# Altium PCB PCB.PcbDoc (part 2 of 2)
Units mm, origin at the board's own origin, x right, y up, seen from the top; angles counter-clockwise.
Board outline 50 x 50 mm, 2 copper layers (Top Layer, Bottom Layer), stack 1.509 mm thick; 202 components, 107 nets, 579 pads, 22 vias.
Unrouted connection lines stored in the file: 421.
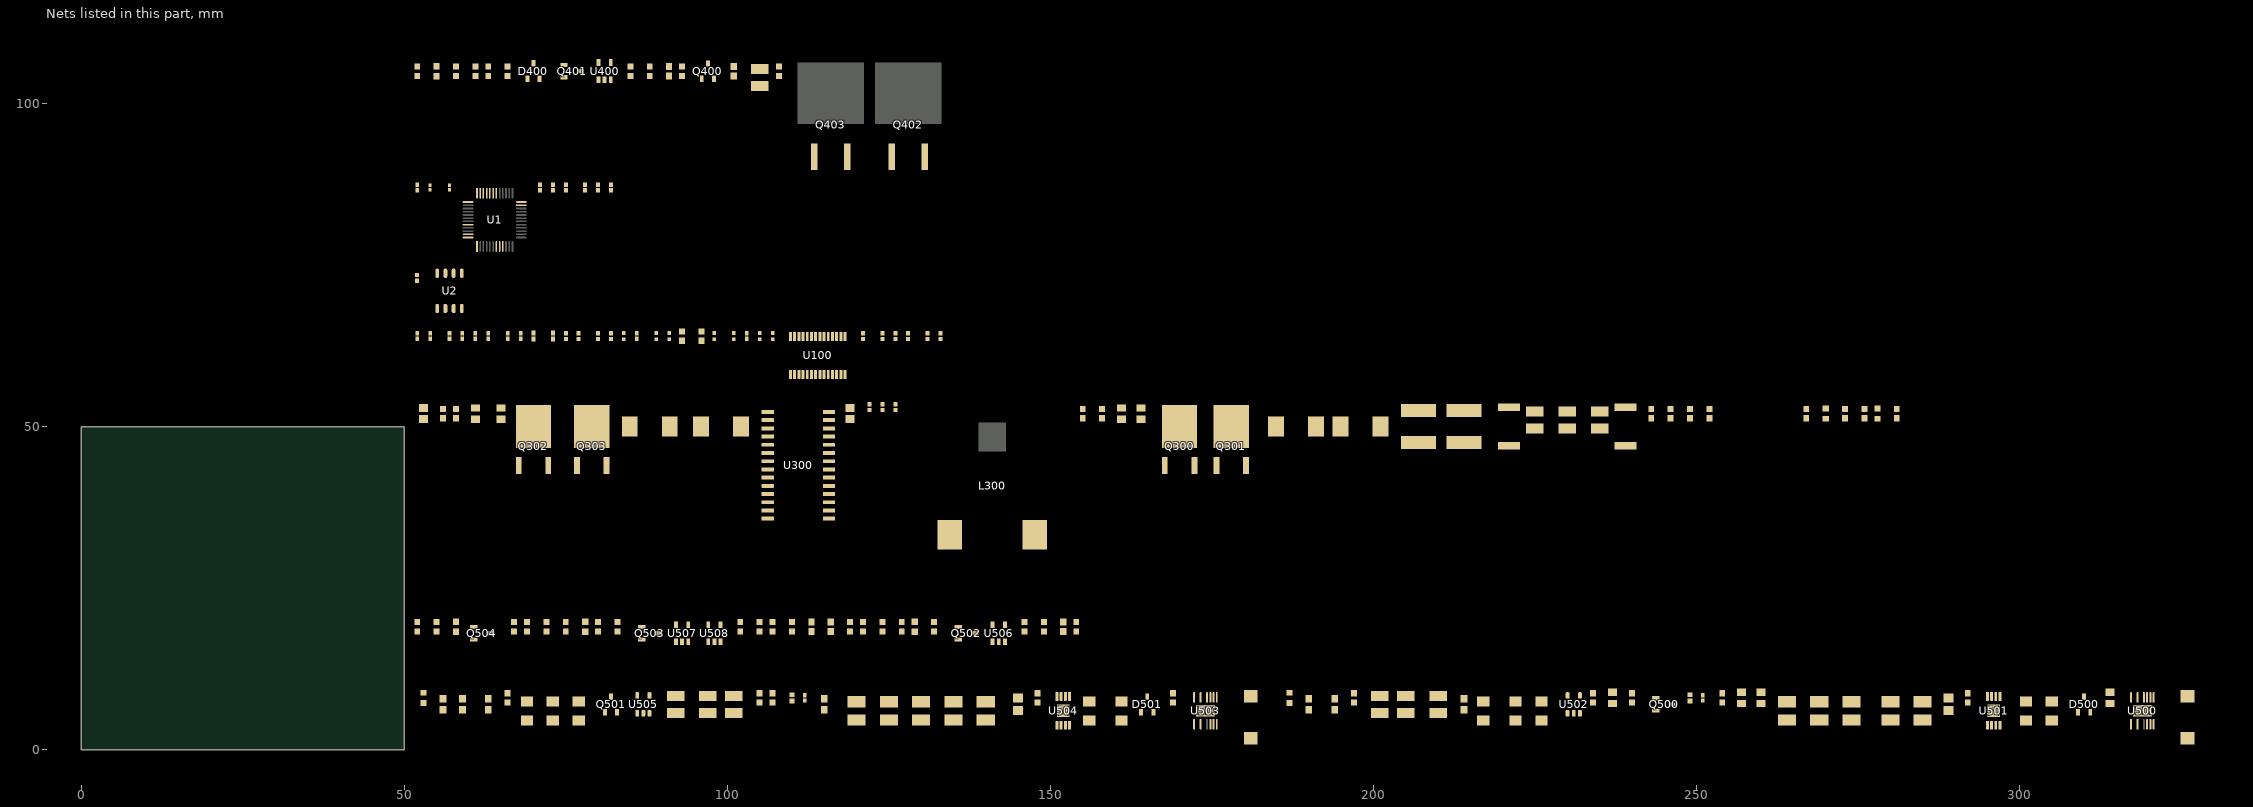
[diagram p2: the nets of this part, all layers, seen from the top]

## Part data (continued)
D300 D301 D302 D303: library part CMP-022-000008-3, "Schottky Barrier Diode 100V 5A 850mV SMC MDD", Blocking Voltage=100V, Forward Current=5A0, LCSC Part Number=C19229, Package=DO-214AB, ComponentLink1Description=Datasheet, ComponentLink1URL=https://datasheet.lcsc.com/lcsc/2012031610_MDD（Microdiode-Electronics）-SS510C_C19229.pdf, Placement=CRITICAL
D400 D500 D501: library part CMP-022-000007-2, "Schottky Barrier Diode Common Cathode 30V 200mA", Forward Current=200mA, LCSC Part Number=C559091, Manufacturer=LRC, Package=SOT23-3, Reverse Voltage=30V, ComponentLink1Description=Datasheet, ComponentLink1URL=https://datasheet.lcsc.com/lcsc/2006151233_LRC-S-LBAT54CLT1G_C559091.pdf, Design Item ID=LBAT54CLT1G, Placement=CRITICAL, Source="Schottky Barrier Diodes.SchLib"
L300: library part CMP-000028-3, "Helically Would High Current Inductor. 30uH, 8.6A, 17mOhm", DC Resistance=17mR, Manufacturor=TDK, Rated Current=8A6, Saturation Current=11A5, Tolerance=±10%, ComponentLink1Description=Datasheet, ComponentLink1URL=https://media.digikey.com/pdf/Data%20Sheets/TDK%20PDFs/B82559BxA019_Series_DS.pdf, Core=Ferrite, Placement=CRITICAL
L500 L501: library part CMP-032-000004-1, "Inductor 220uH ±20% 0A65 470mR Wirewound Shielded", DC Resistance=520mR, LCSC Part Number=C24679, Manufacturer=TDK, Max Operating Temperature=85°C, Min Operating Temperature=-40°C, Rated Current=0A33, Tolerance=±20%, ComponentLink1Description=Datasheet, ComponentLink1URL=https://product.tdk.com/system/files/dam/doc/product/inductor/inductor/smd/catalog/inductor_commercial_power_slf7045_en.pdf, Core=Ferrite, Populate=CRITICAL, RoHS=Yes, Saturation Current=0A33, Shielding=Shielded
Q300 Q301 Q302 Q303: library part CMP-000029-4, "Trans Mosfet N-ch 80V 44A 3-PIN TO-252 T/r", Case/Package=TO-252-3, Continuous Drain Current=44A, Drain Source Resistance=17mR, Input Capacitance=1.949nF, Max Operating Temperature=150°C, Max Power Dissipation=2.7W, Maximum Drain Source Voltage=80V, Min Operating Temperature=-55°C, ComponentLink1Description=Datasheet, ComponentLink1URL=https://www.diodes.com/assets/Datasheets/DMT8012LK3.pdf, Placement=CRITICAL
Q400: library part CMP-040-000005-4, "BJT NPN 1A5 25V SOT-23-3", Collector Emitter Saturation Voltage=0V5, LCSC Part Number=C2150, Manufacturer="Changjiang Electronics", Maximum Collector Current=1A5, Maximum Collector Emitter Voltage=25V, Power=300mW, Component Type=Standard, ComponentLink1Description=Datasheet, ComponentLink1URL=https://datasheet.lcsc.com/lcsc/1809211023_Changjiang-Electronics-Tech--CJ-SS8050-G_C164886.pdf, DC Gain=120-400, Pin Count=3, Placement=CRITICAL, Source=BJTs.SchLib
Q401: library part CMP-040-000009-1, "Small Signal MOSFET, 170mA, 100V, N-Channel, Enhancement, JCET SOT-23-3", Drain-Source On Resistance=10R, Gate Threshold Voltage=2V8, LCSC Part Number=C79015, Manufacturer=JCET, Maximum Drain Current=0.17A, Maximum Gate Source Voltage=±20V, Package=SOT-23-3, Power=0.35W, ComponentLink1Description=Datasheet, ComponentLink1URL=https://datasheet.lcsc.com/lcsc/1809211016_Changjiang-Electronics-Tech--CJ-BSS123_C79015.pdf, Pin Count=3, Placement=CRITICAL
Q402 Q403: library part CMP-040-000010-1, "Trans MOSFET P-CH 60V 18.5A Automotive 3-Pin(2+Tab) D2PAK T/R", Case/Package=D2PAK, Continuous Drain Current (ID)=18.5A, Drain to Source Resistance=120mR, Gate to Source Voltage (Vgs)=20V, LCSC Part Number=C150241, Max Operating Temperature=175°C, Maximum Drain Source Voltage=-60V, Min Operating Temperature=-55°C, Power Dissipation=88W, Threshold Voltage=-1.5V, ComponentLink1Description=Datasheet, ComponentLink1URL=https://datasheet.lcsc.com/lcsc/1811081955_ON-Semiconductor-NTB5605PT4G_C150241.pdf, Placement=CRITICAL, Polarity=P-CHANNEL, Rds On Max=140mR, RoHS Compliant=Yes
Q500: library part CMP-040-000000-12, "Small Signal MOSFET, 500 mA, 60 V, N-Channel, Enhancement, JCET SOT-23-3", Drain-Source On Resistance=7R, Gate Threshold Voltage=2V5, LCSC Part Number=C8545, Manufacturer=JCET, Maximum Drain Current=0.2A, Maximum Drain Source Voltage=60V, Maximum Gate Source Voltage=±20V, Package=SOT-23-3, Power=0.225W, ComponentLink1Description=Datasheet, ComponentLink1URL=https://datasheet.lcsc.com/szlcsc/Changjiang-Electronics-Tech-CJ-2N7002_C8545.pdf, Placement=CRITICAL
Q501: library part CMP-040-000004-5, "Small Signal MOSFET, 130 mA, 50 V, P-Channel, Enhancement, LRC SOT-23-3", Drain-Source On Resistance=10R, Gate Threshold Voltage=2V0, LCSC Part Number=C8492, Manufacturer="Leshan Radio Company", Maximum Drain Current=0.13A, Maximum Drain Source Voltage=-50V, Maximum Gate Source Voltage=±20V, Package=SOT-23-3, Power=0.225W, ComponentLink1Description=Datasheet, ComponentLink1URL=https://datasheet.lcsc.com/szlcsc/Leshan-Radio-LBSS84LT1G_C8492.pdf, Placement=CRITICAL
Q502: library part CMP-040-000009-4, "Small Signal MOSFET, 170mA, 100V, N-Channel, Enhancement, JCET SOT-23-3", Drain-Source On Resistance=10R, Gate Threshold Voltage=2V8, LCSC Part Number=C79015, Manufacturer=JCET, Maximum Drain Current=0.17A, Maximum Drain Source Voltage=100V, Maximum Gate Source Voltage=±20V, Package=SOT-23-3, Power=0.35W, ComponentLink1Description=Datasheet, ComponentLink1URL=https://datasheet.lcsc.com/lcsc/1809211016_Changjiang-Electronics-Tech--CJ-BSS123_C79015.pdf, Placement=CRITICAL
Q503 Q504: library part CMP-040-000000-8, "Small Signal MOSFET, 500 mA, 60 V, N-Channel, Enhancement, JCET SOT-23-3", Drain-Source On Resistance=7R, Gate Threshold Voltage=2V5, LCSC Part Number=C8545, Manufacturer=JCET, Maximum Drain Current=0.2A, Maximum Drain Source Voltage=60V, Maximum Gate Source Voltage=±20V, Package=SOT-23-3, Power=0.225W, ComponentLink1Description=Datasheet, ComponentLink1URL=https://datasheet.lcsc.com/szlcsc/Changjiang-Electronics-Tech-CJ-2N7002_C8545.pdf, Placement=CRITICAL
R1 R2: library part CMP-010-000323-12, "Resistor 2K2 0402 ±1% Thick Film Uniroyal", LCSC Part Number=C25879, Manufacturer=Uniroyal, Package=0402, Power=62mW, Temperature="-55 - 155°C", Temperature Coefficient=±100ppm/K, Tolerance=±1%, Working Voltage=50V, ComponentLink1Description=Datasheet, ComponentLink1URL=https://datasheet.lcsc.com/szlcsc/1811062009_UNI-ROYAL-Uniroyal-Elec-0603WAF1002T5E_C25804.pdf, Pin Count=2, Populate=CRITICAL
R3 R115 R116 R117 R118 R119 R120: library part CMP-010-000292-12, "Resistor 10K 0402 ±1% Thick Film Uniroyal", LCSC Part Number=C25744, Manufacturer=Uniroyal, Package=0402, Power=62mW, Temperature="-55 - 155°C", Temperature Coefficient=±100ppm/K, Tolerance=±1%, Working Voltage=50V, ComponentLink1Description=Datasheet, ComponentLink1URL=https://datasheet.lcsc.com/szlcsc/1811062009_UNI-ROYAL-Uniroyal-Elec-0603WAF1002T5E_C25804.pdf, Pin Count=2
  R3 R118 R119 R120: Populate=CRITICAL
  R115 R116 R117: Populate=DNP
R100 R102 R103 R107 R109 R110: library part CMP-010-000355-2, "Generic 0402 Ressitor", Package=0402, Power=62mW, Temperature="-55 - 155°C", Tolerance=±0%, Component Type=Standard, ComponentLink1Description=Datasheet, ComponentLink1URL=https://datasheet.lcsc.com/szlcsc/1811062009_UNI-ROYAL-Uniroyal-Elec-0603WAF1002T5E_C25804.pdf, Pin Count=2, Populate=CRITICAL
R101: library part CMP-010-000301-12, "Resistor 12K 0402 ±1% Thick Film Uniroyal", LCSC Part Number=C25752, Manufacturer=Uniroyal, Package=0402, Power=62mW, Temperature="-55 - 155°C", Temperature Coefficient=±100ppm/K, Tolerance=±1%, Working Voltage=50V, ComponentLink1Description=Datasheet, ComponentLink1URL=https://datasheet.lcsc.com/szlcsc/1811062009_UNI-ROYAL-Uniroyal-Elec-0603WAF1002T5E_C25804.pdf, Pin Count=2, Populate=CRITICAL
R104: library part CMP-010-000350-5, "Resistor 68K 0603 ±1% Thick Film Uniroyal", LCSC Part Number=C23231, Package=0603, Power=0.1W, Temperature="-55 - 155°C", Tolerance=±1%, Component Type=Standard, ComponentLink1Description=Datasheet, ComponentLink1URL=https://datasheet.lcsc.com/szlcsc/1811062009_UNI-ROYAL-Uniroyal-Elec-0603WAF1002T5E_C25804.pdf, Design Item ID="Res 68K 0603", Pin Count=2, Populate=CRITICAL, Source=Resistors.SchLib
R105: library part CMP-010-000354-2, "Resistor 560K 0603 ±1% Thick Film Uniroyal", LCSC Part Number=C23203, Package=0603, Power=0.1W, Temperature="-55 - 155°C", Tolerance=±1%, Component Type=Standard, ComponentLink1Description=Datasheet, ComponentLink1URL=https://datasheet.lcsc.com/szlcsc/1811062009_UNI-ROYAL-Uniroyal-Elec-0603WAF1002T5E_C25804.pdf, Design Item ID="Res 100K 0603", Pin Count=2, Populate=CRITICAL, Source=Resistors.SchLib
R106: library part CMP-010-000292-3, "Resistor 10K 0402 ±1%Thick Film Uniroyal Elec", LCSC Part Number=C25744, Package=0402, Power=62mW, Temperature="-55 - 155°C", Tolerance=±1%, Component Type=Standard, ComponentLink1Description=Datasheet, ComponentLink1URL=https://datasheet.lcsc.com/szlcsc/1811062009_UNI-ROYAL-Uniroyal-Elec-0603WAF1002T5E_C25804.pdf, Design Item ID="Res 10K 0402", Pin Count=2, Populate=CRITICAL, Source=Resistors.SchLib
R108: library part CMP-010-000325-13, "Resistor 2K7 0402 ±1% Thick Film Uniroyal", LCSC Part Number=C25885, Manufacturer=Uniroyal, Package=0402, Power=62mW, Temperature="-55 - 155°C", Temperature Coefficient=±100ppm/K, Tolerance=±1%, Working Voltage=50V, ComponentLink1Description=Datasheet, ComponentLink1URL=https://datasheet.lcsc.com/szlcsc/1811062009_UNI-ROYAL-Uniroyal-Elec-0603WAF1002T5E_C25804.pdf, Pin Count=2, Populate=CRITICAL
R111 R112: library part CMP-010-000331-13, "Resistor 33K 0402 ±1% Thick Film Uniroyal", LCSC Part Number=C25779, Manufacturer=Uniroyal, Package=0402, Power=62mW, Temperature="-55 - 155°C", Temperature Coefficient=±100ppm/K, Tolerance=±1%, Working Voltage=50V, ComponentLink1Description=Datasheet, ComponentLink1URL=https://datasheet.lcsc.com/szlcsc/1811062009_UNI-ROYAL-Uniroyal-Elec-0603WAF1002T5E_C25804.pdf, Pin Count=2, Populate=CRITICAL
R113: library part CMP-010-000334-13, "Resistor 3K9 0402 ±1% Thick Film Uniroyal", LCSC Part Number=C51721, Manufacturer=Uniroyal, Package=0402, Power=62mW, Temperature="-55 - 155°C", Temperature Coefficient=±100ppm/K, Tolerance=±1%, Working Voltage=50V, ComponentLink1Description=Datasheet, ComponentLink1URL=https://datasheet.lcsc.com/szlcsc/1811062009_UNI-ROYAL-Uniroyal-Elec-0603WAF1002T5E_C25804.pdf, Pin Count=2, Populate=CRITICAL
R114: library part CMP-010-000386-1, "Resistor 8K2 0402 ±1% Thick Film Uniroyal", LCSC Part Number=C25924, Manufacturer=Uniroyal, Package=0402, Power=62mW, Temperature="-55 - 155°C", Temperature Coefficient=±100ppm/K, Tolerance=±1%, Working Voltage=50V, ComponentLink1Description=Datasheet, ComponentLink1URL=https://datasheet.lcsc.com/szlcsc/1811062009_UNI-ROYAL-Uniroyal-Elec-0603WAF1002T5E_C25804.pdf, Pin Count=2, Populate=CRITICAL
R300 R301: library part CMP-010-000347-8, "Resistor 82K 0603 ±1% Thick Film Uniroyal", LCSC Part Number=C23254, Manufacturer=Uniroyal, Package=0603, Power=0.1W, Temperature="-55 - 155°C", Temperature Coefficient=±100ppm/K, Tolerance=±1%, Working Voltage=50V, ComponentLink1Description=Datasheet, ComponentLink1URL=https://datasheet.lcsc.com/szlcsc/1811062009_UNI-ROYAL-Uniroyal-Elec-0603WAF1002T5E_C25804.pdf, Pin Count=2, Populate=CRITICAL
R302 R303 R304 R305: library part CMP-010-000308-10, "Resistor 1K0 0603 ±1% Thick Film Uniroyal", LCSC Part Number=C21190, Manufacturer=Uniroyal, Package=0603, Power=0.1W, Temperature="-55 - 155°C", Temperature Coefficient=±100ppm/K, Tolerance=±1%, Working Voltage=50V, ComponentLink1Description=Datasheet, ComponentLink1URL=https://datasheet.lcsc.com/szlcsc/1811062009_UNI-ROYAL-Uniroyal-Elec-0603WAF1002T5E_C25804.pdf, Pin Count=2, Populate=CRITICAL
R306 R307: library part CMP-010-000388-1, "Resistor 10mR 2512 ±1% Thick Film Current Sense Uniroyal", LCSC Part Number=C127692, Manufacturer=Uniroyal, Package=2512, Power=1W, Temperature="-55 - 155°C", Temperature Coefficient=±800ppm/K, Tolerance=±1%, Working Voltage=200V, ComponentLink1Description=Datasheet, ComponentLink1URL=https://datasheet.lcsc.com/lcsc/1810301111_UNI-ROYAL-Uniroyal-Elec-25121WF100MT4E_C127692.pdf, Pin Count=2, Populate=CRITICAL
R308 R309 R312 R313 R512: library part CMP-010-000293-8, "Resistor 10K 0603 ±1% Thick Film Uniroyal", LCSC Part Number=C25804, Manufacturer=Uniroyal, Package=0603, Power=0.1W, Temperature="-55 - 155°C", Temperature Coefficient=±100ppm/K, Tolerance=±1%, Working Voltage=50V, ComponentLink1Description=Datasheet, ComponentLink1URL=https://datasheet.lcsc.com/szlcsc/1811062009_UNI-ROYAL-Uniroyal-Elec-0603WAF1002T5E_C25804.pdf, Pin Count=2, Populate=CRITICAL
R310 R408 R523 R529: library part CMP-010-000313-11, "Resistor 1M0 0603 ±1% Thick Film Uniroyal", LCSC Part Number=C22935, Manufacturer=Uniroyal, Package=0603, Power=0.1W, Temperature="-55 - 155°C", Temperature Coefficient=±100ppm/K, Tolerance=±1%, Working Voltage=50V, ComponentLink1Description=Datasheet, ComponentLink1URL=https://datasheet.lcsc.com/szlcsc/1811062009_UNI-ROYAL-Uniroyal-Elec-0603WAF1002T5E_C25804.pdf, Pin Count=2, Populate=CRITICAL
R311 R509 R515: library part CMP-010-000288-9, "Resistor 100K 0603 ±1% Thick Film Uniroyal", LCSC Part Number=C25803, Manufacturer=Uniroyal, Package=0603, Power=0.1W, Temperature="-55 - 155°C", Temperature Coefficient=±100ppm/K, Tolerance=±1%, Working Voltage=50V, ComponentLink1Description=Datasheet, ComponentLink1URL=https://datasheet.lcsc.com/szlcsc/1811062009_UNI-ROYAL-Uniroyal-Elec-0603WAF1002T5E_C25804.pdf, Pin Count=2, Populate=CRITICAL
R314 R315 R316 R317: library part CMP-010-000281-12, "Jumper 0805 2A Uniroyal", Current=2A, LCSC Part Number=C17477, Manufacturer=Uniroyal, Package=0805, Temperature="-55 - 155°C", ComponentLink1Description=Datasheet, ComponentLink1URL=https://datasheet.lcsc.com/szlcsc/1811062009_UNI-ROYAL-Uniroyal-Elec-0603WAF1002T5E_C25804.pdf, Pin Count=2, Populate=CRITICAL
R400 R510: library part CMP-010-000364-2, "Resistor 680K 0603 ±1% Thick Film Uniroyal", LCSC Part Number=C25822, Manufacturer=Uniroyal, Package=0603, Power=0.1W, Temperature="-55 - 155°C", Temperature Coefficient=±100ppm/K, Tolerance=±1%, Working Voltage=50V, ComponentLink1Description=Datasheet, ComponentLink1URL=https://datasheet.lcsc.com/szlcsc/1811062009_UNI-ROYAL-Uniroyal-Elec-0603WAF1002T5E_C25804.pdf, Pin Count=2, Populate=CRITICAL
R401 R505: library part CMP-010-000332-9, "Resistor 33K 0603 ±1% Thick Film Uniroyal", LCSC Part Number=C4216, Manufacturer=Uniroyal, Package=0603, Power=0.1W, Temperature="-55 - 155°C", Temperature Coefficient=±100ppm/K, Tolerance=±1%, Working Voltage=50V, ComponentLink1Description=Datasheet, ComponentLink1URL=https://datasheet.lcsc.com/szlcsc/1811062009_UNI-ROYAL-Uniroyal-Elec-0603WAF1002T5E_C25804.pdf, Pin Count=2, Populate=CRITICAL
R402 R406: library part CMP-010-000350-8, "Resistor 68K 0603 ±1% Thick Film Uniroyal", LCSC Part Number=C23231, Manufacturer=Uniroyal, Package=0603, Power=0.1W, Temperature="-55 - 155°C", Temperature Coefficient=±100ppm/K, Tolerance=±1%, Working Voltage=50V, ComponentLink1Description=Datasheet, ComponentLink1URL=https://datasheet.lcsc.com/szlcsc/1811062009_UNI-ROYAL-Uniroyal-Elec-0603WAF1002T5E_C25804.pdf, Pin Count=2, Populate=CRITICAL
R403 R407 R516 R517 R520 R524 R526 R530 R532 R534: library part CMP-010-000294-8, "Resistor 10M 0603 ±1% Thick Film Uniroyal", LCSC Part Number=C7250, Manufacturer=Uniroyal, Package=0603, Power=0.1W, Temperature="-55 - 155°C", Temperature Coefficient=±200ppm/K, Tolerance=±1%, Working Voltage=50V, ComponentLink1Description=Datasheet, ComponentLink1URL=https://datasheet.lcsc.com/szlcsc/1811062009_UNI-ROYAL-Uniroyal-Elec-0603WAF1002T5E_C25804.pdf, Pin Count=2, Populate=CRITICAL
R404: library part CMP-010-000387-2, "Resistor 560R 0603 ±1% Thick Film Uniroyal", LCSC Part Number=C23204, Manufacturer=Uniroyal, Package=0603, Power=0.1W, Temperature="-55 - 155°C", Temperature Coefficient=±200ppm/K, Tolerance=±1%, Working Voltage=50V, ComponentLink1Description=Datasheet, ComponentLink1URL=https://datasheet.lcsc.com/szlcsc/1811062009_UNI-ROYAL-Uniroyal-Elec-0603WAF1002T5E_C25804.pdf, Pin Count=2, Populate=CRITICAL
R405: library part CMP-010-000384-1, "Resistor 6K8 0603 ±1% Thick Film Uniroyal", LCSC Part Number=C23212, Manufacturer=Uniroyal, Package=0603, Power=0.1W, Temperature="-55 - 155°C", Temperature Coefficient=±100ppm/K, Tolerance=±1%, Working Voltage=50V, ComponentLink1Description=Datasheet, ComponentLink1URL=https://datasheet.lcsc.com/szlcsc/1811062009_UNI-ROYAL-Uniroyal-Elec-0603WAF1002T5E_C25804.pdf, Pin Count=2, Populate=CRITICAL
R500: library part CMP-010-000314-12, "Resistor 1M0 0805 ±1% Thick Film Uniroyal", LCSC Part Number=C17514, Manufacturer=Uniroyal, Package=0805, Power=0.125W, Temperature="-55 - 155°C", Temperature Coefficient=±100ppm/K, Tolerance=±1%, Working Voltage=150V, ComponentLink1Description=Datasheet, ComponentLink1URL=https://datasheet.lcsc.com/szlcsc/1811062009_UNI-ROYAL-Uniroyal-Elec-0603WAF1002T5E_C25804.pdf, Pin Count=2, Populate=CRITICAL
R501: library part CMP-010-000369-2, "Resistor 390K 0805 ±1% Thick Film Uniroyal", LCSC Part Number=C17656, Manufacturer=Uniroyal, Package=0805, Power=0.125W, Temperature="-55 - 155°C", Temperature Coefficient=±100ppm/K, Tolerance=±1%, Working Voltage=150V, ComponentLink1Description=Datasheet, ComponentLink1URL=https://datasheet.lcsc.com/szlcsc/1811062009_UNI-ROYAL-Uniroyal-Elec-0603WAF1002T5E_C25804.pdf, Pin Count=2, Populate=CRITICAL
R502: library part CMP-010-000371-3, "Resistor 680K 0805 ±1% Thick Film Uniroyal", LCSC Part Number=C17797, Manufacturer=Uniroyal, Package=0805, Power=0.125W, Temperature="-55 - 155°C", Temperature Coefficient=±100ppm/K, Tolerance=±1%, Working Voltage=150V, ComponentLink1Description=Datasheet, ComponentLink1URL=https://datasheet.lcsc.com/szlcsc/1811062009_UNI-ROYAL-Uniroyal-Elec-0603WAF1002T5E_C25804.pdf, Pin Count=2, Populate=CRITICAL
R503: library part CMP-010-000374-2, "Resistor 1M2 0603 ±1% Thick Film Uniroyal", LCSC Part Number=C22766, Manufacturer=Uniroyal, Package=0603, Power=0.1W, Temperature="-55 - 155°C", Temperature Coefficient=±100ppm/K, Tolerance=±1%, Working Voltage=50V, ComponentLink1Description=Datasheet, ComponentLink1URL=https://datasheet.lcsc.com/szlcsc/1811062009_UNI-ROYAL-Uniroyal-Elec-0603WAF1002T5E_C25804.pdf, Pin Count=2, Populate=CRITICAL
R504 R513: library part CMP-010-000287-13, "Resistor 100K 0402 ±1% Thick Film Uniroyal", LCSC Part Number=C25741, Manufacturer=Uniroyal, Package=0402, Power=62mW, Temperature="-55 - 155°C", Temperature Coefficient=±100ppm/K, Tolerance=±1%, Working Voltage=50V, ComponentLink1Description=Datasheet, ComponentLink1URL=https://datasheet.lcsc.com/szlcsc/1811062009_UNI-ROYAL-Uniroyal-Elec-0603WAF1002T5E_C25804.pdf, Pin Count=2
  R504: Populate=CRITICAL
  R513: Populate=DNP
R506: library part CMP-010-000373-3, "Resistor 15K 0805 ±1% Thick Film Uniroyal", LCSC Part Number=C17475, Manufacturer=Uniroyal, Package=0805, Power=0.125W, Temperature="-55 - 155°C", Temperature Coefficient=±100ppm/K, Tolerance=±1%, Working Voltage=150V, ComponentLink1Description=Datasheet, ComponentLink1URL=https://datasheet.lcsc.com/szlcsc/1811062009_UNI-ROYAL-Uniroyal-Elec-0603WAF1002T5E_C25804.pdf, Pin Count=2, Populate=CRITICAL
R507: library part CMP-010-000303-8, "Resistor 150K 0603 ±1% Thick Film Uniroyal", LCSC Part Number=C22807, Manufacturer=Uniroyal, Package=0603, Power=0.1W, Temperature="-55 - 155°C", Temperature Coefficient=±100ppm/K, Tolerance=±1%, Working Voltage=50V, ComponentLink1Description=Datasheet, ComponentLink1URL=https://datasheet.lcsc.com/szlcsc/1811062009_UNI-ROYAL-Uniroyal-Elec-0603WAF1002T5E_C25804.pdf, Pin Count=2, Populate=CRITICAL
R508: library part CMP-010-000333-5, "Resistor 390K 0603 ±1%Thick Film Uniroyal Elec", LCSC Part Number=C23150, Package=0603, Power=0.1W, Temperature="-55 - 155°C", Tolerance=±1%, __ORIG_LIFECYCLESTATEGUID__=706004B5-C76E-482E-903B-BA0E4FAE086A, Component Type=Standard, ComponentLink1Description=Datasheet, ComponentLink1URL=https://datasheet.lcsc.com/szlcsc/1811062009_UNI-ROYAL-Uniroyal-Elec-0603WAF1002T5E_C25804.pdf, Design Item ID="Res 390K 0603", Pin Count=2, Populate=CRITICAL, Source=Resistors.SchLib
R511: library part CMP-010-000378-2, "Resistor 390K 0603 ±1% Thick Film Uniroyal", LCSC Part Number=C23150, Manufacturer=Uniroyal, Package=0603, Power=0.1W, Temperature="-55 - 155°C", Temperature Coefficient=±100ppm/K, Tolerance=±1%, Working Voltage=50V, ComponentLink1Description=Datasheet, ComponentLink1URL=https://datasheet.lcsc.com/szlcsc/1811062009_UNI-ROYAL-Uniroyal-Elec-0603WAF1002T5E_C25804.pdf, Pin Count=2, Populate=CRITICAL
R514: library part CMP-010-000365-2, "Resistor 120K 0603 ±1% Thick Film Uniroyal", LCSC Part Number=C25808, Manufacturer=Uniroyal, Package=0603, Power=0.1W, Temperature="-55 - 155°C", Temperature Coefficient=±100ppm/K, Tolerance=±1%, Working Voltage=50V, ComponentLink1Description=Datasheet, ComponentLink1URL=https://datasheet.lcsc.com/szlcsc/1811062009_UNI-ROYAL-Uniroyal-Elec-0603WAF1002T5E_C25804.pdf, Pin Count=2, Populate=CRITICAL
R518 R535: library part CMP-010-000375-2, "Resistor 6M8 0603 ±1% Thick Film Uniroyal", LCSC Part Number=C23213, Manufacturer=Uniroyal, Package=0603, Power=0.1W, Temperature="-55 - 155°C", Temperature Coefficient=±200ppm/K, Tolerance=±1%, Working Voltage=50V, ComponentLink1Description=Datasheet, ComponentLink1URL=https://datasheet.lcsc.com/szlcsc/1811062009_UNI-ROYAL-Uniroyal-Elec-0603WAF1002T5E_C25804.pdf, Pin Count=2, Populate=CRITICAL
R519 R528: library part CMP-010-000381-1, "Resistor 470R 0603 ±5% Thick Film Uniroyal", LCSC Part Number=C23179, Manufacturer=Uniroyal, Package=0603, Power=0.1W, Temperature="-55 - 155°C", Temperature Coefficient=±100ppm/K, Tolerance=±1%, Working Voltage=50V, ComponentLink1Description=Datasheet, ComponentLink1URL=https://datasheet.lcsc.com/szlcsc/1811062009_UNI-ROYAL-Uniroyal-Elec-0603WAF1002T5E_C25804.pdf, Pin Count=2, Populate=CRITICAL
R521 R531: library part CMP-010-000379-1, "Resistor 2M7 0603 ±1% Thick Film Uniroyal", LCSC Part Number=C26095, Manufacturer=Uniroyal, Package=0603, Power=0.1W, Temperature="-55 - 155°C", Temperature Coefficient=±200ppm/K, Tolerance=±1%, Working Voltage=50V, ComponentLink1Description=Datasheet, ComponentLink1URL=https://datasheet.lcsc.com/szlcsc/1811062009_UNI-ROYAL-Uniroyal-Elec-0603WAF1002T5E_C25804.pdf, Pin Count=2, Populate=CRITICAL
R522: library part CMP-010-000376-1, "Resistor 33M 0603 ±5% Thick Film Stackpole", LCSC Part Number=C114705, Manufacturer=Stackpole, Package=0603, Power=0.1W, Temperature="-55 - 125°C", Temperature Coefficient=±400ppm/K, Tolerance=±5%, Working Voltage=50V, ComponentLink1Description=Datasheet, ComponentLink1URL=https://datasheet.lcsc.com/szlcsc/1811062009_UNI-ROYAL-Uniroyal-Elec-0603WAF1002T5E_C25804.pdf, Pin Count=2, Populate=CRITICAL
R525: library part CMP-010-000383-1, "Resistor 2M2 0603 ±1% Thick Film Uniroyal", LCSC Part Number=C22938, Manufacturer=Uniroyal, Package=0603, Power=0.1W, Temperature="-55 - 155°C", Temperature Coefficient=±100ppm/K, Tolerance=±1%, Working Voltage=50V, ComponentLink1Description=Datasheet, ComponentLink1URL=https://datasheet.lcsc.com/szlcsc/1811062009_UNI-ROYAL-Uniroyal-Elec-0603WAF1002T5E_C25804.pdf, Pin Count=2, Populate=CRITICAL
R527 R533: library part CMP-010-000382-1, "Resistor 330K 0603 ±1% Thick Film Uniroyal", LCSC Part Number=C23137, Manufacturer=Uniroyal, Package=0603, Power=0.1W, Temperature="-55 - 155°C", Temperature Coefficient=±100ppm/K, Tolerance=±1%, Working Voltage=50V, ComponentLink1Description=Datasheet, ComponentLink1URL=https://datasheet.lcsc.com/szlcsc/1811062009_UNI-ROYAL-Uniroyal-Elec-0603WAF1002T5E_C25804.pdf, Pin Count=2, Populate=CRITICAL
U1: library part CMP-051-000053-6, "IC MCU 32BIT 128KB FLASH 48LQFP", Frequency=32MHz, LCSC Part Number=C465977, Max Operating Temperature=85°C, Min Operating Temperature=-40°C, Package=LQFP, ComponentLink1Description="Series Page", ComponentLink1URL=https://www.st.com/en/microcontrollers-microprocessors/stm32l0-series.html, ComponentLink2Description="Product Page", ComponentLink2URL=https://www.st.com/content/st_com/en/products/microcontrollers-microprocessors/stm32-32-bit-arm-cortex-mcus/stm32-ultra-low-power-mcus/stm32l0-series/stm32l0x2/stm32l072cb.html, ComponentLink3Description=Datasheet, ComponentLink3URL=https://www.st.com/resource/en/datasheet/stm32l072cb.pdf, Interface=I2C,SPI,USB,IrDA,UART,USART, Memory Size=128KB, Placement=CRITICAL, RoHS Compliant=Yes
U2: library part CMP-001-0001-4, "IC EEPROM 64KBIT 1MHZ 8TSSOP", Case/Package=SOIC, LCSC Part Number=C79988, Manufacturer=STMicroelectronics, Manufacturer Part Number=M24512-RDW6TP, Max Frequency=400kHz, Max Operating Temperature=85°C, Max Supply Voltage=5.5V, Min Operating Temperature=-40°C, Min Supply Voltage=1.8V, Nominal Supply Current=3mA, Operating Supply Voltage=5V, Package Quantity=2500, Access Time=900ns, Category=EEPROM, Component Type=Standard, ComponentLink1Description=Datasheet, ComponentLink1URL=https://www.st.com/resource/en/datasheet/m24c64-r.pdf, ComponentLink2Description="Product Page", ComponentLink2URL=https://www.st.com/en/memories/m24c64-r.html, Density=64Kb, Design Item ID=M24512-RMN6TP, Interface=I2C, Lead Free="Lead Free", Memory Size=64Kb, Memory Type=EEPROM, Mount="Surface Mount", Number of Pins=8, Packaging="Tape and Reel", Pin Count=8, Placement=CRITICAL, Pricing 2="1=0,32900, 10=0,32900, 25=0,32900, 50=0,32900, 100=0,30200, 250=0,30200, 500=0,30200, 1000=0,30200 (USD)", Radiation Hardening=No, RoHS=Yes, Source=M24.SchLib, Stock 2=540
U100: library part CMP-019-00000-4, "Texas Instruments MPPT Photovoltaic Cell Controller, 220kHz, TSSOP-28", Case/Package=TSSOP, Input Current=10nA, Max Input Voltage=5.25V, Max Operating Temperature=105°C, Min Input Voltage=4.75V, Min Operating Temperature=-40°C, Supply Current=11.5mA, ComponentLink1Description=Datasheet, ComponentLink1URL=https://www.ti.com/lit/ds/symlink/sm72442.pdf?ts=1624215339045&ref_url=https%253A%252F%252Fwww.ti.com%252Fproduct%252FSM72442, Height=0.9mm, Max Supply Voltage=5.25V, Min Supply Voltage=4.75V, Placement=CRITICAL, RoHS=Yes
U300: library part CMP-000000-7, "Photovoltaic Full BridgeDriver 3A Non-Inv 28-Pin SOIC W T/R", ComponentLink1Description=Datasheet, ComponentLink1URL=https://www.ti.com/lit/ds/symlink/sm72295.pdf?HQS=dis-dk-null-digikeymode-dsf-pf-null-wwe&ts=1623830847089, Placement=CRITICAL
U400 U506 U507 U508: library part CMP-000025-2, "Comparator, Push-Pull, 1V6-5V5, 600nA,  SOT-23-5", Input Bias Current=1pA, Input Offset Voltage (Vos)=7mV, Max Operating Temperature=85°C, Max Supply Voltage=5.5V, Min Operating Temperature=-40°C, Min Supply Voltage=1.6V, Nominal Supply Current=1mA, Output Current=2mA, Package=SOT-23-5, Quiescent Current=1uA, ComponentLink1Description=Datasheet, ComponentLink1URL=https://ww1.microchip.com/downloads/en/DeviceDoc/MCP6541%20Output%20SubMicroamp%20Comparators%2020001696K.pdf, Hysteresis=6.5mV, Output Type=Push-Pull, Placement=CRITICAL, Propagation Delay=8us, RoHS=Yes
U500 U503: library part CMP-055-000003-4, "DC-DC Conv 4V to 150V Synchronous Step Down Single-Out 0.8V to 150V 0.1A Automotive 12-Pin MSOP EP", Max Output Voltage=150V, Min Input Voltage=4V, Min Output Voltage=800mV, Output Current=100mA, Package=SOP, Temperature="-40°C - 125°C", ComponentLink1Description=Datasheet, ComponentLink1URL=https://www.analog.com/media/en/technical-documentation/data-sheets/3639fd.pdf, ComponentLink2Description="Design Note", ComponentLink2URL=https://www.analog.com/media/en/reference-design-documentation/design-notes/dn532f.pdf, Placement=CRITICAL, RoHS=Yes
U501 U504: library part CMP-008-000008-4, "Adjustable LDO Voltage Regulator, 7 V to 100 V, 780 mV Drop, 1.161 V to 90 V / 50 mA out, MSOP-8", Dropout Voltage=780mV, LCSC Part Number=C55006, Max Input Voltage=100V, Max Output Current=50mA, Max Output Voltage=90V, Max Power Dissipation=833mW, Min Input Voltage=7V, Min Output Voltage=1.2V, Package=MSOP, Power=1.83W, Quiescent Current=20uA, Reference Voltage=1.185V, Temperature="-40°C - 125°C", ComponentLink1Description=Datasheet, ComponentLink1URL=https://www.ti.com/lit/ds/symlink/tps7a4001.pdf?HQS=dis-dk-null-digikeymode-dsf-pf-null-wwe&ts=1626937665102&ref_url=https%253A%252F%252Fwww.digikey.de%252F, Output Current=50mA, Output Voltage=90V, Placement=CRITICAL, RoHS=Yes
U502: library part CMP-008-000009-4, "LDO Fixed 5V, 0.15A, 1% Accuracy, Max 16V Input, 65uA Iq, SOT-23-5", Case/Package=SOT-23-5, Dropout Voltage=280mV, LCSC Part Number=C109382, Manufacturer="Texas Instruments", Max Input Voltage=16V, Max Operating Temperature=125°C, Max Output Current=150mA, Max Output Voltage=5V, Min Input Voltage=2.2V, Min Operating Temperature=-40°C, Quiescent Current=65uA, Accuracy=1%, ComponentLink1Description=Datasheet, ComponentLink1URL=https://www.ti.com/lit/ds/symlink/lp2985.pdf?ts=1627290889620&ref_url=https%253A%252F%252Fwww.google.com%252F, Max Supply Voltage=16V, Output Voltage=5V, Placement=CRITICAL, RoHS=Yes
U505: library part CMP-008-000010-2, "LDO Fixed 3V3, 0.15A, 1% Accuracy, Max 16V Input, 65uA Iq, SOT-23-5", Case/Package=SOT-23-5, Dropout Voltage=280mV, LCSC Part Number=C89826, Manufacturer="Texas Instruments", Max Input Voltage=16V, Max Operating Temperature=125°C, Max Output Current=150mA, Max Output Voltage=5V, Min Input Voltage=2.2V, Min Operating Temperature=-40°C, Output Voltage=3.3V, Quiescent Current=65uA, Accuracy=1%, ComponentLink1Description=Datasheet, ComponentLink1URL=https://www.ti.com/lit/ds/symlink/lp2985.pdf?ts=1627290889620&ref_url=https%253A%252F%252Fwww.google.com%252F, Max Supply Voltage=16V, Placement=CRITICAL, RoHS=Yes

## Via types
v1: diameter 0.5, hole 0.2, Top Layer to Bottom Layer, 22 vias

## Nets (pads, with @x,y where several pads share a name; then routed paths per layer and width w, separated by ;. In a path a pad name is that pad's centre, name@x,y a point inside that pad or via, vN(x,y) a via of type N, cw(c..) or ccw(c..) an arc to the next point about the centre after c; other vN are vias at no path point)
CTRL_I2C_0: U100.6
CTRL_I2C_1: R115.2 R118.1 U100.7
CTRL_I2C_2: R116.2 R119.1 U100.22
CTRL_I2C_3: R117.2 R120.1
GND: C1.2 C2.2 C3.2 C4.2 C5.2 C6.2 C7.2 C100.2 C101.2 C102.2 C103.2 C104.2 C105.2 C106.2 C107.2 C108.2 C109.2 C302.2 C303.2 C304.2 C305.2 C306.2 C307.2 C308.2 C309.2 C400.2 C401.2 C403.2 C500.2 C501.2 C502.2 C503.2 C504.2 C505.2 C506.2 C508.2 C509.2 C510.2 C511.2 C514.2 C515.2 C516.2 C519.2 C520.2 C521.2 C522.2 C523.2 C524.2 C525.2 C526.2 C527.2 C528.2 C529.2 C530.2 C531.2 C532.2 C534.2 C535.2 C546.2 C547.2 C548.2 C549.2 C551.2 C552.2 C553.2 C554.2 C555.2 C556.2 C557.2 C558.2 D302.2 D303.2 Q302.3 Q303.3 Q401.2 Q500.2 Q502.2 Q503.2 Q504.2 R3.2 R107.2 R108.2 R109.2 R110.2 R113.2 R114.2 R118.2 R119.2 R120.2 R300.2 R301.2 R308.2 R309.2 R311.2 R406.2 R407.2 R504.2 R505.2 R506.2 R507.2 R512.2 R513.2 R514.2 R520.2 R521.2 R530.1 R531.2 R532.1 R533.2 U1.8 U1.23 U1.35 U1.47 U2.1 U2.2 U2.3 U2.4 U100.2 U100.4 U100.10 U100.13 U300.5 U300.23 U400.2 U500.6 U500.7 U500.8 U500.16 U500.17 U501.3 U501.4 U501.6 U501.7 U501.9 U502.2 U503.6 U503.8 U503.16 U503.17 U504.3 U504.4 U504.6 U504.7 U504.9 U505.2 U506.2 U507.2 U508.2
  other v1: 151.26,5.31 152.74,5.31 295.26,5.31 296.74,5.31 172.9,5.45 174,5.45 175.1,5.45 317.9,5.45 319,5.45 320.1,5.45 152,6 296,6 172.9,6.55 174,6.55 175.1,6.55 317.9,6.55 319,6.55 320.1,6.55 151.26,6.69 152.74,6.69 295.26,6.69 296.74,6.69
HOB: R315.1 U300.19
HSB: C311.2 D301.2 D303.1 L300.2 Q301.3 Q303.4 R313.2 U300.18
LTC3639_5V_EN: Q503.3 R523.2 U503.14
LTC_5V0_ISET: R513.1 U503.11
LTC_5V0_OVLO: R501.2 R502.2 R506.1 R510.2 R512.1 U500.12 U503.12
LTC_5V0_SS: C508.1 C534.1 U500.10 U503.7 U503.10
LTC_5V0_SW: L501.1 U503.1
LTC_5V0_UVLO: R500.2 R501.1 R502.1 U500.14
LTC_10V0_FB: Q500.3 R505.1 R508.2 U500.9
NetC106_1: C106.1 R100.2 R107.1 U100.14
NetC107_1: C107.1 R101.2 R108.1 U100.16
NetC108_1: C108.1 R102.2 R109.1 U100.18
NetC109_1: C109.1 R103.2 R110.1 U100.20
NetC301_1: C301.1 C307.1 C308.1 C309.1 D301.1 Q301.4 R303.1 R307.1
NetC305_1: C305.1 C306.1 D300.1 Q300.4 R304.1 R306.2
NetC310_1: C310.1 U300.26
NetC310_2: C310.2 D300.2 D302.1 L300.1 Q300.3 Q302.4 R312.2 U300.28
NetC311_1: C311.1 U300.20
NetC401_1: C401.1 R405.1 R406.1 R408.1 U400.3
NetC402_1: C402.1 C403.1 Q400.3 Q402.3 Q403.3 R400.1
NetC402_2: C402.2 Q400.2 Q402.1 Q403.1 R401.2 R402.1
NetC507_2: C507.2 R503.2 R507.1 U501.2
NetC524_1: C524.1 U502.4
NetC533_2: C533.2 R511.2 R514.1 U504.2
NetC535_1: C535.1 C550.1 Q501.3 U503.9
NetC551_1: C551.1 U505.4
NetC554_1: C554.1 Q502.1 R519.2
NetC557_1: C557.1 C558.1 Q503.1 Q504.1 R528.2
NetD400_3: D400.3 R405.2
NetD500_2: D500.2 U501.1
NetD501_2: D501.2 U504.1
NetL500_1: L500.1 U500.1
NetQ300_1: Q300.1 R312.1 R314.2
NetQ301_1: Q301.1 R313.1 R315.2
NetQ302_1: Q302.1 R308.1 R316.2
NetQ303_1: Q303.1 R309.1 R317.2
NetQ400_1: Q400.1 R400.2 R401.1
NetQ401_1: Q401.1 R404.2
NetQ401_3: Q401.3 R402.2
NetR1_2: R1.2 U1.31 U2.5 U100.9
NetR2_2: R2.2 U1.30 U2.6 U100.8
NetR3_1: R3.1 U1.44
NetR104_2: R104.2 R105.2 U100.23
NetR106_1: R106.1 U100.5
NetR111_1: R111.1 R113.1 U100.15
NetR111_2: R111.2
NetR112_1: R112.1 R114.1 U100.17
NetR112_2: R112.2
NetR300_1: R300.1 U300.12
NetR301_1: R301.1 U300.3
NetR310_2: R310.2 R311.1 U300.16
NetR314_1: R314.1 U300.27
NetR316_1: R316.1 U300.24
NetR317_1: R317.1 U300.22
NetR403_2: R403.2 R407.1 U400.4
NetR404_1: R404.1 R408.2 U400.1
NetR504_1: R504.1 U500.11
NetR509_2: R509.2 U502.3
NetR515_2: R515.2 U505.3
NetR517_2: R517.2 R520.1 U506.4
NetR518_2: R518.2 R521.1 R522.1 U506.3
NetR519_1: R519.1 R522.2 U506.1
NetR524_1: R524.1 R530.2 U507.4
NetR525_2: R525.2 R531.1 R534.1 U507.3
NetR526_1: R526.1 R532.2 U508.4
NetR527_2: R527.2 R533.1 R535.1 U508.3
NetR528_1: R528.1 R534.2 U507.1
NetR529_1: R529.1 R535.2 U508.1
NetU1_7: U1.7
NetU1_32: U1.32
NetU1_33: U1.33
NetU1_34: U1.34
NetU1_37: U1.37
NetU2_7: U2.7
NetU100_1: U100.1
NetU100_19: U100.19
NetU100_21: U100.21
NetU100_24: U100.24 U300.9
NetU100_25: U100.25 U300.8
NetU100_26: U100.26 U300.7
NetU100_27: U100.27 U300.6
NetU100_28: U100.28
NetU300_4: U300.4
NetU300_10: U300.10
NetU300_11: U300.11
NetU300_15: U300.15
PM_OUT: D400.1 D400.2
PM_OUT_DC: U100.11
PP3V3_G3H: C552.1 U505.5
PP5V0_A_G3H: C100.1 C101.1 C102.1 C400.1 C525.1 C553.1 C555.1 C556.1 R403.1 R517.1 R523.1 R524.2 R527.1 U100.12 U400.5 U502.5 U506.5 U507.5 U508.5
PP5V0_D_G3H: C1.1 C2.1 C3.1 C4.1 C5.1 C6.1 C7.1 C103.1 C104.1 C105.1 C302.1 C533.1 C546.1 C547.1 C548.1 C549.1 C550.2 D501.3 Q501.2 R1.1 R2.1 R100.1 R101.1 R102.1 R103.1 R104.1 R105.1 R106.2 R115.1 R116.1 R117.1 R511.1 R515.1 R525.1 U1.1 U1.9 U1.24 U1.36 U1.48 U2.8 U100.3 U300.17 U505.1
PP5V0_S_G3H: C526.1 C527.1 D501.1 L501.2 R526.2
PP10V0_G3H: C303.1 C304.1 C507.1 C519.1 C520.1 C521.1 C522.1 C523.1 D500.3 R503.1 R508.1 R509.1 U300.21 U300.25 U502.1
PP10V0_S_G3H: C500.1 C501.1 D500.1 L500.2 R518.1
PP_PVIN_X: C300.1 C502.1 C503.1 C504.1 C505.1 C506.1 C509.1 C510.1 C511.1 C514.1 C515.1 C516.1 C528.1 C529.1 C530.1 C531.1 C532.1 R305.1 R306.1 R310.1 R500.1 R510.1 R516.1 U500.3 U501.8 U503.3 U504.8
PP_PVREG_G3H: R302.1 R307.2
SI_N: C300.2 R304.2 U300.2
SI_P: R305.2 U300.1
SO_N: C301.2 R302.2 U300.13
SO_P: R303.2 U300.14
TPS4A7001_5V0_EN: Q501.1 Q504.3 R529.2 U504.5
TPS4A7001_10V0_EN: Q500.1 Q502.3 R516.2 U501.5
pads on no net: L300.3 Q402.4 Q403.4 U1.2 U1.3 U1.4 U1.5 U1.6 U1.10 U1.11 U1.12 U1.13 U1.14 U1.15 U1.16 U1.17 U1.18 U1.19 U1.20 U1.21 U1.22 U1.25 U1.26 U1.27 U1.28 U1.29 U1.38 U1.39 U1.40 U1.41 U1.42 U1.43 U1.45 U1.46 U500.5 U503.5

## Silkscreen, mask and mechanical layers (free items; w line width, h text height)
Drill Drawing:
  lines w0.254: 68.435,114.406 70.128,114.406 70.128,116.1 68.435,116.1 68.435,114.406
  lines w0.381: 66.916,113.263 309.927,113.263 ; 66.916,117.073 309.927,117.073 ; 68.076,136.436 78.428,136.436 112,136.436 127.147,136.436 143.557,136.436 157.947,136.436 ; 68.076,139.466 78.428,139.466 112,139.466 127.147,139.466 143.557,139.466 157.947,139.466 ; 68.076,142.495 78.428,142.495 112,142.495 127.147,142.495 143.557,142.495 157.947,142.495 ; 68.076,145.525 78.428,145.525 112,145.525 127.147,145.525 143.557,145.525 157.947,145.525 ; 68.076,148.554 78.428,148.554 112,148.554 127.147,148.554 143.557,148.554 157.947,148.554 ; 68.076,151.584 78.428,151.584 112,151.584 127.147,151.584 143.557,151.584 157.947,151.584 ; 68.076,154.614 78.428,154.614 112,154.614 127.147,154.614 143.557,154.614 157.947,154.614 ; 68.076,157.643 78.428,157.643 112,157.643 127.147,157.643 143.557,157.643 157.947,157.643 ; 68.076,160.673 157.947,160.673 ; 78.428,163.703 78.428,133.406 ; 80.908,109.453 80.908,120.883 ; 94.621,109.453 94.621,120.883 ; 112,163.703 112,133.406 ; 121.029,109.453 121.029,120.883 ; 127.147,163.703 127.147,133.406 ; 133.879,109.453 133.879,120.883 ; 143.557,163.703 143.557,133.406 ; 152.517,109.453 152.517,120.883 ; 190.606,109.453 190.606,120.883 ; 205.588,109.453 205.588,120.883 ; 224.531,109.453 224.531,120.883 ; 241.037,109.453 241.037,120.883 ; 274.91,109.453 274.91,120.883 ; 78.428,133.406 68.076,133.406 68.076,163.703 157.947,163.703 157.947,133.406 143.557,133.406 ; 78.428,133.406 112,133.406 ; 112,133.406 127.147,133.406 ; 127.147,133.406 143.557,133.406 ; 66.916,109.453 309.927,109.453 309.927,120.883 66.916,120.883 66.916,109.453
  text "Layer" at 69.845,161.43 h1.51
  text "Name" at 80.197,161.43 h1.51
  text "Material" at 113.769,161.43 h1.51
  text "Thickness" at 128.916,161.43 h1.51
  text "Constant" at 145.326,161.43 h1.51
  text "Top Overlay" at 80.197,158.401 h1.51
  text "Top Solder" at 80.197,155.371 h1.51
  text "SM-001" at 113.769,155.371 h1.51
  text "0.025mm" at 128.916,155.371 h1.51
  text "4" at 145.326,155.371 h1.51
  text "Top Surface Finish" at 80.197,152.342 h1.51
  text "PbSn" at 113.769,152.342 h1.51
  text "0.020mm" at 128.916,152.342 h1.51
  text "1" at 69.845,149.312 h1.51
  text "Top Layer" at 80.197,149.312 h1.51
  text "CF-004" at 113.769,149.312 h1.51
  text "0.035mm" at 128.916,149.312 h1.51
  text "Dielectric 1" at 80.197,146.282 h1.51
  text "Core-043" at 113.769,146.282 h1.51
  text "1.439mm" at 128.916,146.282 h1.51
  text "4.3" at 145.326,146.282 h1.51
  text "2" at 69.845,143.253 h1.51
  text "Bottom Layer" at 80.197,143.253 h1.51
  text "CF-004" at 113.769,143.253 h1.51
  text "0.035mm" at 128.916,143.253 h1.51
  text "Bottom Surface Finish" at 80.197,140.223 h1.51
  text "PbSn" at 113.769,140.223 h1.51
  text "0.020mm" at 128.916,140.223 h1.51
  text "Bottom Solder" at 80.197,137.193 h1.51
  text "SM-001" at 113.769,137.193 h1.51
  text "0.025mm" at 128.916,137.193 h1.51
  text "4" at 145.326,137.193 h1.51
  text "Bottom Overlay" at 80.197,134.164 h1.51
  text "Total board thickness:" at 69.845,131.134 h1.51
  text "1.600mm" at 128.916,131.134 h1.51
  text "Symbol" at 69.202,118.216 h1.83
  text "Count" at 82.051,118.216 h1.83
  text "Hole Size" at 95.764,118.216 h1.83
  text "Plated" at 122.172,118.216 h1.83
  text "Hole Type" at 135.022,118.216 h1.83
  text "Drill Layer Pair" at 153.66,118.216 h1.83
  text "Via/Pad" at 191.749,118.216 h1.83
  text "Pad Shape" at 206.731,118.216 h1.83
  text "Template" at 225.674,118.216 h1.83
  text "Hole Tolerance (+)" at 242.18,118.216 h1.83
  text "Hole Tolerance (-)" at 276.053,118.216 h1.83
  text "22" at 82.051,114.406 h1.52
  text "7.87mil (0.200mm)" at 95.764,114.406 h1.52
  text "PTH" at 122.172,114.406 h1.52
  text "Round" at 135.022,114.406 h1.52
  text "Top Layer - Bottom Layer" at 153.66,114.406 h1.52
  text "Via" at 191.749,114.406 h1.52
  text "Rounded" at 206.731,114.406 h1.52
  text "v50h20" at 225.674,114.406 h1.52
  text "22 Total" at 82.051,110.596 h1.52